# Altium PCB PCBdesingn for Subsystem intro.PcbDoc
Units mil, origin at the board's own origin, x right, y up, seen from the top; angles counter-clockwise.
Board outline 6000 x 4000 mil, 2 copper layers (Top Layer, Bottom Layer); 6 components, 7 nets, 21 pads, 6 vias.
Unrouted connection lines stored in the file: 6.
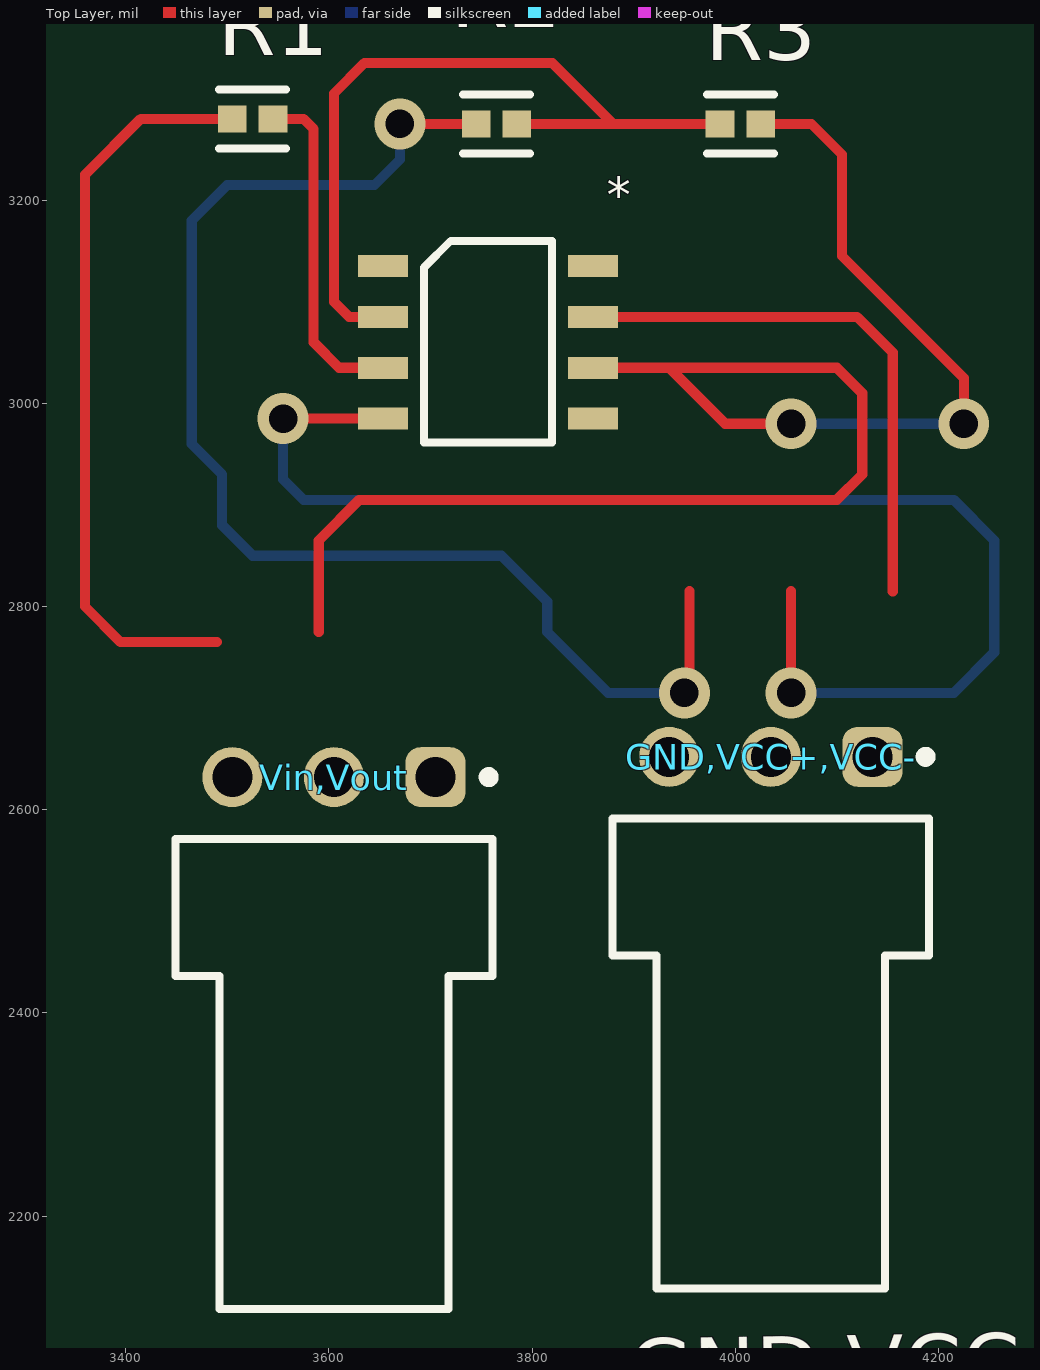
[diagram p0: Top Layer view]
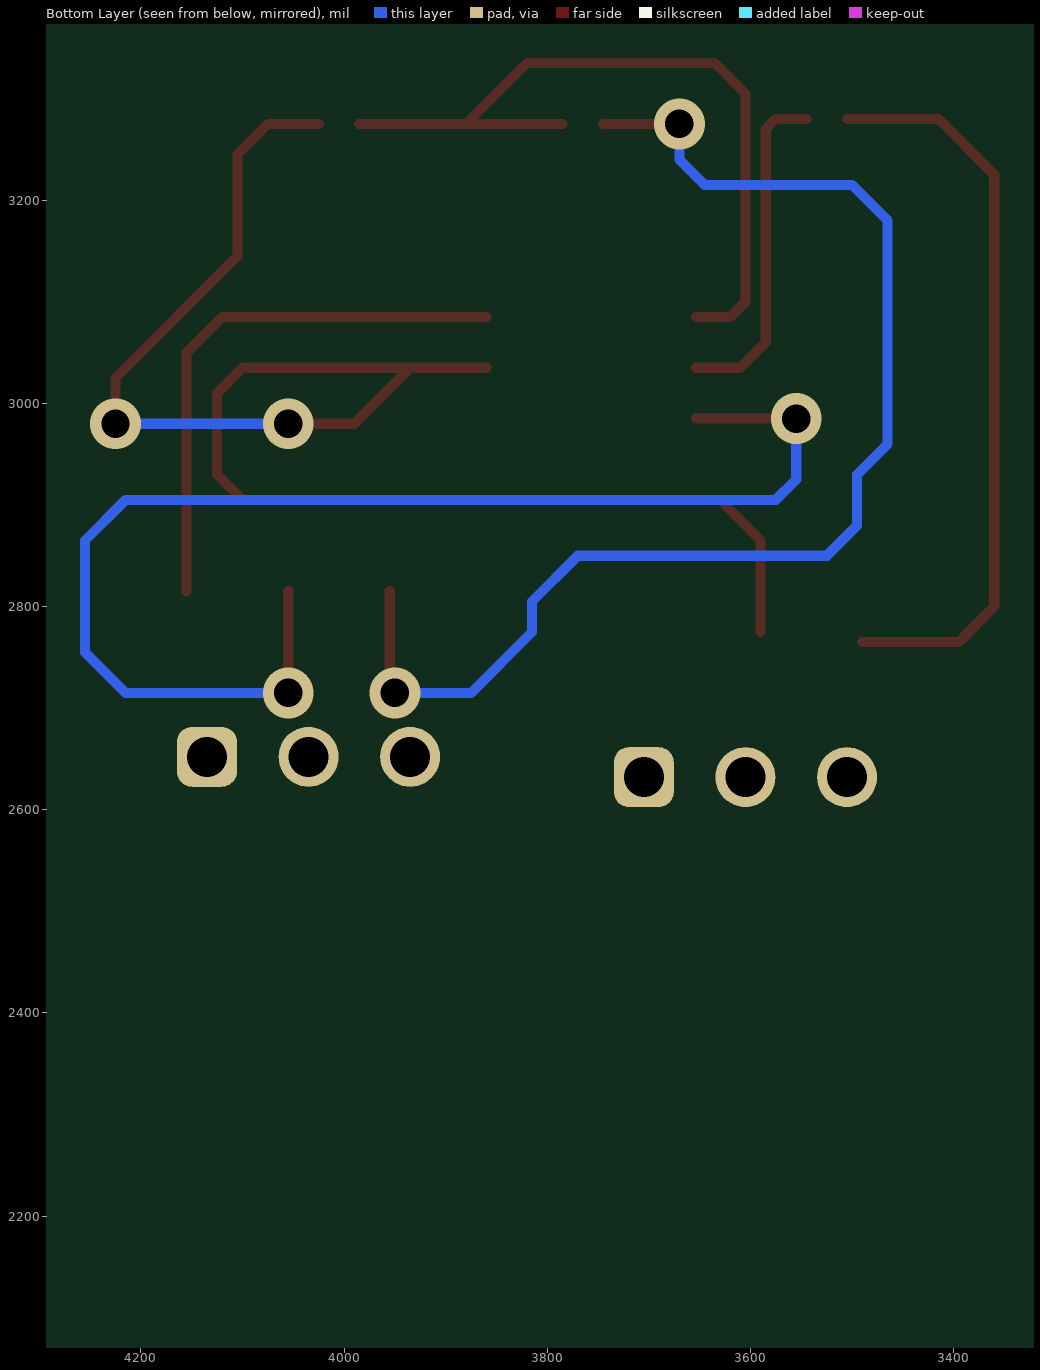
[diagram p1: Bottom Layer view, seen from below]

## Layer stack, top to bottom
Top Solder: solder mask 0.4, Solder Resist, Dk 3.5
Top Layer: signal copper 1.4
Dielectric 1: dielectric 12.6, FR-4, Dk 4.8
Bottom Layer: signal copper 1.4
Bottom Solder: solder mask 0.4, Solder Resist, Dk 3.5

## Board outline
1000,1000 7000,1000 7000,5000 1000,5000

## Design rules (kind name [scope] priority, off if disabled: settings)
Clearance [All] p1: gap=10 ignorepadtopadclearanceinfootprint=FALSE
PolygonConnect [All] p1: connectstyle=Relief reliefconductorwidth=10 reliefentries=4 polygonreliefangle="90 Angle" airgapwidth=10
RoutingVias [All] p1: holewidth=28 width=50 viastyle="Through Hole" minholewidth=28 minwidth=50 maxholewidth=28 maxwidth=50
SolderMaskExpansion [All] p1: expansion=4 istentingtop=FALSE
Width [All] p1: maxlimit=10 minlimit=10 preferedwidth=10
30 further rules are at their usual default settings.

## Components (designator, comment, footprint, x,y, rotation, side; value= is the part's Value field where it differs from the comment)
* "Component_1" PCBComponent_1 3690,2960 r0 top
GND,VCC+,VCC- "61900319521" 61900319521 4035,2360 r0 top
R1 "RC1005F103CS" FP-RC1005-IPC_A 3525,3280 r0 top
R2 "RC1005F103CS" FP-RC1005-IPC_A 3765,3275 r0 top
R3 "RC1005F103CS" FP-RC1005-IPC_A 4005,3275 r0 top
Vin,Vout "61900319521" 61900319521 3605,2340 r0 top

## Footprints (in the part's own frame and the unit in brackets; to place one, negate y for a bottom-side part, rotate by r counter-clockwise, add the part's x,y. Pads: shape width x height; smd on the part's side, far side on the other; paste and mask are expansions set on the pad)
61900319521 [mm] "2.54mm Male Right Angled Locking Header Top Locking, 3p"
  rrect50% 1.5x1.5 hole 1: 1(2.54,7.42)
  round 1.5 hole 1: 2(0,7.42) 3(-2.54,7.42)
  silkscreen extent -3.96,-5.87 3.99,7.54, body extent -3.81,-5.75 3.81,7.77, height 5.83
FP-RC1005-IPC_A [mil]
  rect 28.16x26.48 smd paste+0 mask+0: 1(-20,0) 2(20,0)
  silkscreen extent -33,-29 33,29, body extent -41,-21 41,21, height 10
PCBComponent_1 [mm]
  rect 1.25x0.55 smd: 1(-0.932,4.445) 2(-0.932,3.175) 3(-0.932,1.905) 4(-0.932,0.635) 5(4.318,0.635) 6(4.318,1.905) 7(4.318,3.175) 8(4.318,4.445)
  round 1.016 on Top Overlay: ""(0.889,4.191)
  silkscreen extent 0.09,0.04 3.29,5.08

## Part data
GND,VCC+,VCC- Vin,Vout: library part CMP-1502-00600-2, Color=Beige, Contact Resistance=20mΩ, Current Rating=3A, Flammability Rating="UL94 V-0", Insulation Resistance=1GΩ, Max Operating Temperature=105°C, Min Operating Temperature=-40°C, Operating Supply Voltage=250V, Connector Type="Male Pin", Contact Gender=Male, Contact Material=Copper, Contact Mating Length=7.493mm, Contact Plating=Tin, Fastening Type=Friction, Gender=Male, Height=3.3mm, Housing Material=Nylon, Insulation=Insulated, Lead Free="Lead Free", Lead Pitch=2.54mm, Length=7.62mm, Mount="Through Hole", NexarPartId=18818224, Number of Contacts=3, Number of Pins=3, Number of Positions=3, Number of Rows=1, Packaging=Bulk, Pitch=2.54mm, REACH SVHC=Unknown, RoHS=Compliant, Termination="Through Hole", Voltage Rating=250V, Width=7.62mm
R1 R2 R3: library part CMP-13261-004522-1, "Res Thick Film 0402 10kΩ 1% 0.063W ±100ppm/°C Molded SMD T/R", Case Code (Imperial)=0402, Case Code (Metric)=1005, Max Operating Temperature=155°C, Max Power Dissipation=63mW, Min Operating Temperature=-55°C, Package Quantity=1, Power Rating=62.5mW, Resistance=10kR, Temperature Coefficient=100ppm/°C, Tolerance=1%, Case/Package=0402, Composition="Thick Film", Contact Plating=Tin, Depth=0.5mm, Features="Moisture Resistant", Height=0.016inch, Length=1mm, Military Standard=Not, Mount="Surface Mount", Number of Terminations=2, Packaging="Tape and Reel", Radiation Hardening=No, Width=0.02inch

## Via types
v1: diameter 50, hole 28, Top Layer to Bottom Layer, 6 vias

## Nets (pads, with @x,y where several pads share a name; then routed paths per layer and width w, separated by ;. In a path a pad name is that pad's centre, name@x,y a point inside that pad or via, vN(x,y) a via of type N, cw(c..) or ccw(c..) an arc to the next point about the centre after c; other vN are vias at no path point)
Net*_2: *.2 R2.2 R3.1 | length 771.8
  Top Layer w10: *.2 3620,3085 3605,3100 3605,3305 3635,3335 3820,3335 3880,3275 ; R2.2 R3.1
Net*_3: *.3 R1.2 | length 332.8
  Top Layer w10: R1.2 3575,3280 3585,3270 3585,3060 3610,3035 *.3
Net*_4: *.4 GND,VCC+,VCC-.2 | length 1309.7
  Top Layer w10: v1(3555,2985) *.4 ; v1(4055,2715) 4055,2815
  Bottom Layer w10: v1(3555,2985) 3555,2925 3575,2905 4215,2905 4255,2865 4255,2755 4215,2715 v1(4055,2715)
Net*_6: *.6 R3.2 Vin,Vout.2
Net*_7: *.7 GND,VCC+,VCC-.3
NetGND,VCC+,VCC-_1: GND,VCC+,VCC-.1 R2.1 | length 1295.3
  Top Layer w10: v1(3670,3275) R2.1 ; v1(3950,2715) 3955,2720 3955,2815
  Bottom Layer w10: v1(3670,3275) 3670,3240 3645,3215 3500,3215 3465,3180 3465,2960 3495,2930 3495,2880 3525,2850 3770,2850 3815,2805 3815,2775 3875,2715 v1(3950,2715)
NetR1_1: R1.1 Vin,Vout.3 | length 737.3
  Top Layer w10: 3490,2765 3395,2765 3360,2800 3360,2860 3360,3225 3415,3280 R1.1
pads on no net: *. *.1 *.5 *.8 Vin,Vout.1
copper on no net: | length 2353.8
  Top Layer w10: 3590,2775 3590,2865 3630,2905 4100,2905 4125,2930 4125,3010 4100,3035 3860,3035 3935,3035 3990,2980 v1(4055,2980) v1@4050,2985 ; 3860,3085 4120,3085 4155,3050 4155,2815 ; 4025,3275 4075,3275 4105,3245 4105,3145 4225,3025 v1(4225,2980)
  Bottom Layer w10: v1(4055,2980) v1(4225,2980)